# Altium PCB remote control.PcbDoc
Units mil, origin at the board's own origin, x right, y up, seen from the top; angles counter-clockwise.
Board outline 6000 x 4000 mil, 2 copper layers (Top Layer, Bottom Layer); 60 components, 48 nets, 210 pads, 56 vias.
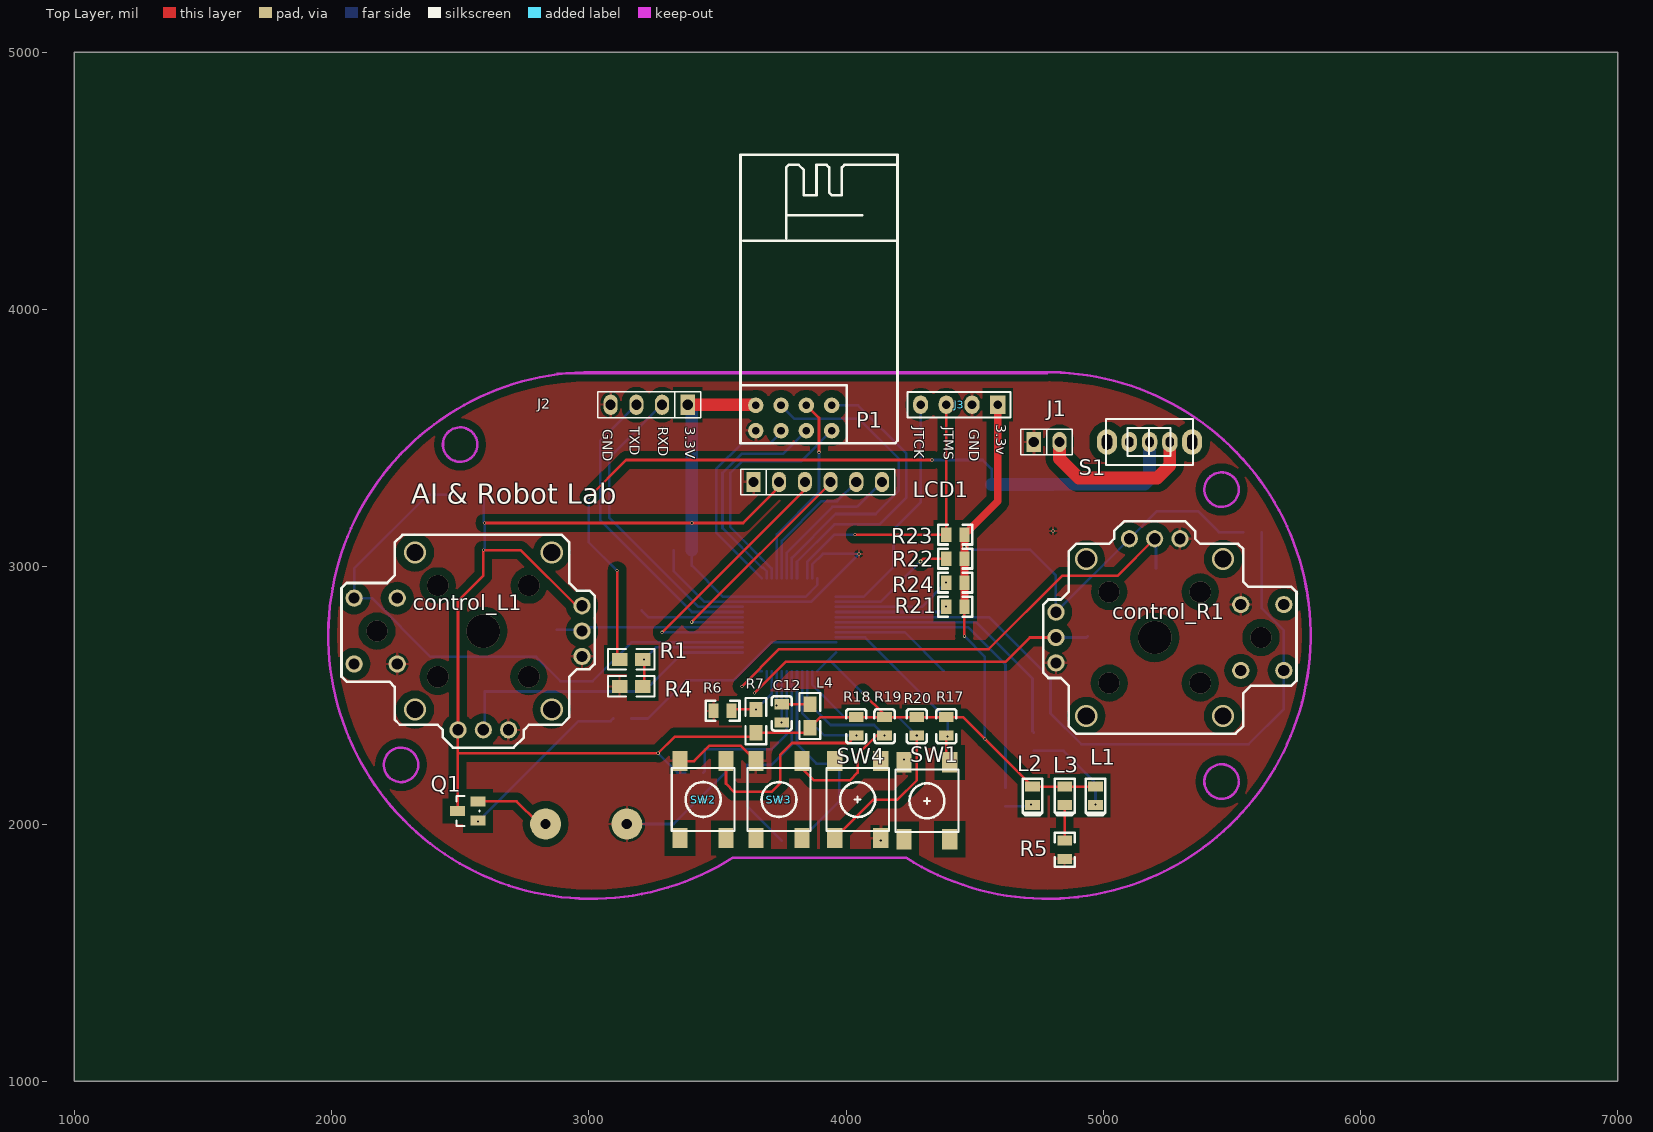
[diagram p0: Top Layer view]
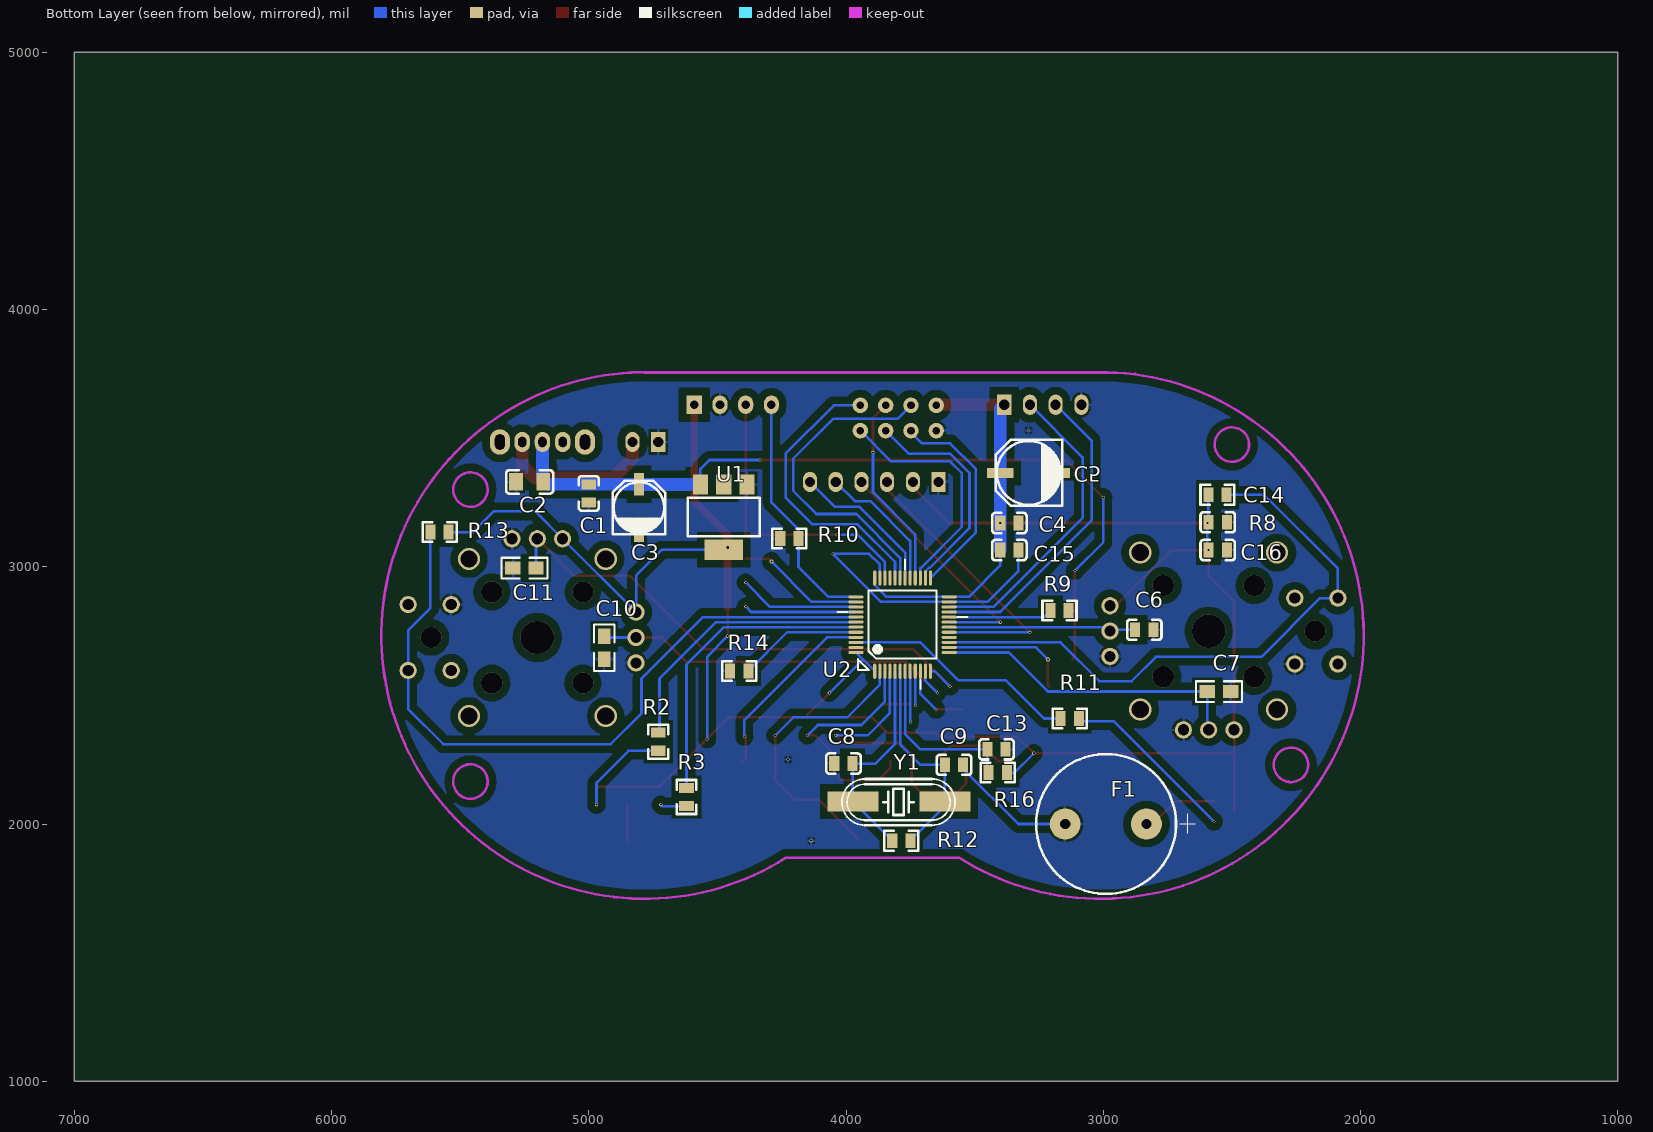
[diagram p1: Bottom Layer view, seen from below]
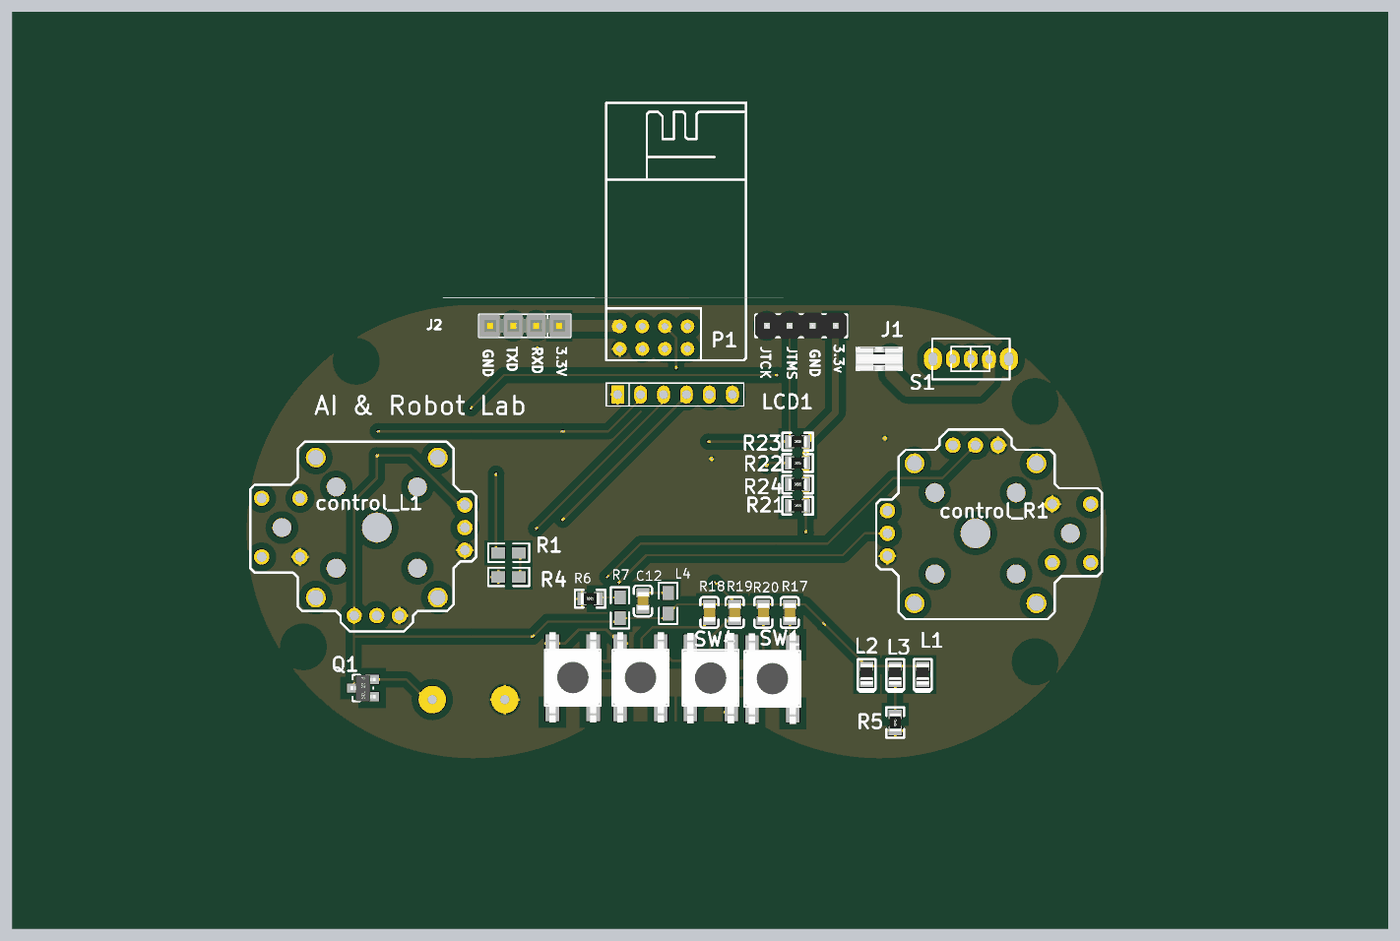
[diagram p2: 3D render of the assembled board from above, using the file's embedded part models]
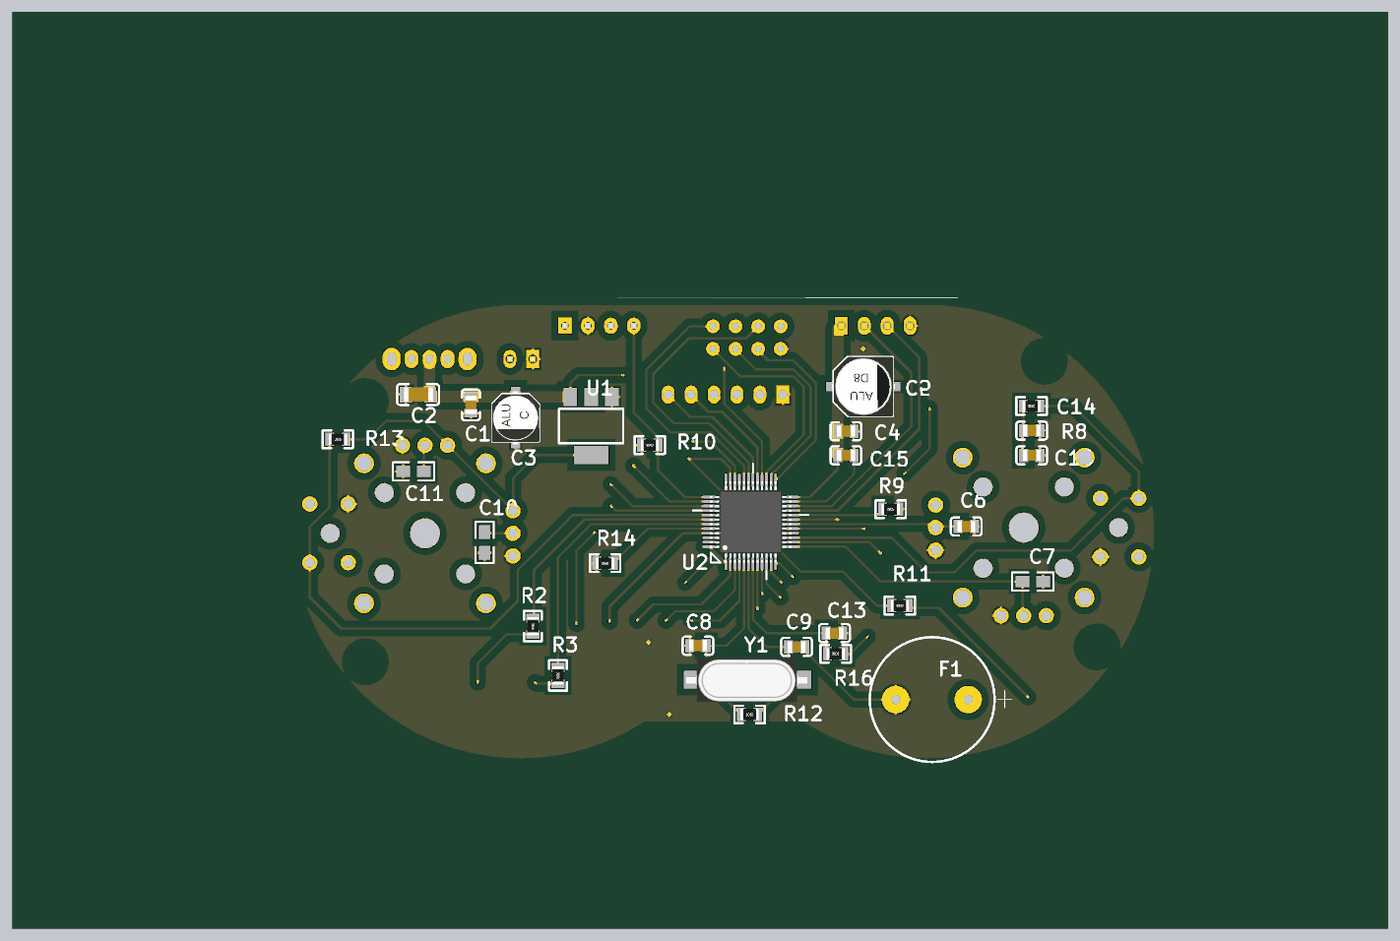
[diagram p3: 3D render of the assembled board from below, using the file's embedded part models]

## Layer stack, top to bottom
Top Solder: solder mask 0.4, Solder Resist, Dk 3.5
Top Layer: signal copper 1.4
Dielectric 1: dielectric 12.6, FR-4, Dk 4.8
Bottom Layer: signal copper 1.4
Bottom Solder: solder mask 0.4, Solder Resist, Dk 3.5

## Board outline
1000,1000 7000,1000 7000,5000 1000,5000
cut-out: 2875,3755 2880,3750 4785,3750

## Design rules (kind name [scope] priority, off if disabled: settings)
Clearance [All] p1: gap=30
PolygonConnect [All] p1: connectstyle=Relief reliefconductorwidth=10 reliefentries=4 polygonreliefangle="90 Angle" airgapwidth=10
RoutingVias [All] p1: holewidth=100 width=200 viastyle="Through Hole" minholewidth=8 minwidth=10 maxholewidth=100 maxwidth=200
SolderMaskExpansion [All] p1: expansion=4
Width [All] p1: maxlimit=50 minlimit=10 preferedwidth=10
29 further rules are at their usual default settings.

## Components (designator, comment, footprint, x,y, rotation, side; value= is the part's Value field where it differs from the comment)
C1 "104" 0805C 5000,3285 r270 bottom
C2 "4.7UF" 1206C 5230,3330 r0 bottom
C3 "CAPE" C_EC 4805,3230 r180 bottom
C4 "0.1UF" 0805C 3365,3170 r180 bottom
C5 "CAPE" C_ED8 3290,3365 r90 bottom
C6 "1uF" 0805C 2840.43,2755 r0 bottom
C7 "1uF" 0805 2505,2515 r0 bottom
C8 "20PF" 0805C 4010,2235 r180 bottom
C9 "20PF" 0805C 3580,2230 r0 bottom
C10 "1uF" 0805 4940,2640 r90 bottom
C11 "1uF" 0805 5295,2995 r180 bottom
C12 "0.1uF" 0805C 3750,2430 r270 top
C13 "104" 0805C 3415,2290 r0 bottom
C14 "100NF" 0805C 2555,3172.92 r180 bottom
C15 "100NF" 0805C 3365,3065 r180 bottom
C16 "100NF" 0805C 2555,3065 r180 bottom
control_L1 "Joy Stick" PS2 2590,2750 r0 top
control_R1 "Joy Stick" PS2 5200,2725 r180 top
F1 "BELL" BELL 2990,2000 r180 bottom
J1 "POWER" SIP2 4730,3485 r0 top
J2 "CON4" SIP4 3385,3630 r180 top
J3 "ST_LINK" P4_2.54-1 4440,3630 r180 top
L1 "LED" 0805D 4970,2110 r270 top
L2 "LED" 0805D 4725,2110 r270 top
L3 "LED" 0805D 4850,2110 r270 top
L4 "INDUCTOR" 0805 3860,2375 r90 top
LCD1 "CON6" SIP6 3640,3330 r0 top
P1 "2.4GHz Module" 2.4Gmedal 3590,3480 r270 top
Q1 "NPN" SOT-23(BEC-123) 2490,2050 r90 top
R1 "RES" 0805 3210,2640 r180 top
R2 "Res1" 0805R 4730,2320 r270 bottom
R3 "Res1" 0805R 4620,2105 r270 bottom
R4 "RES" 0805 3120,2535 r0 top
R5 "Res1" 0805R 4850,1900 r90 top
R6 "RES" 0805 3650,2445 r270 top
R7 "RES" 0805R 3520,2440 r0 top
R8 "10K" 0805R 2555.85,3280 r0 bottom
R9 "RES" 0805R 3170,2830 r180 bottom
R10 "RES" 0805R 4220,3110 r0 bottom
R11 "10K" 0805R 3130,2410 r0 bottom
R12 "RES" 0805R 3785,1935 r0 bottom
R13 "10K" 0805R 5580,3135 r180 bottom
R14 "RES" 0805R 4415,2595 r0 bottom
R16 "10K" 0805R 3410,2200 r180 bottom
R17 "10K" 0805C 4390,2380 r270 top
R18 "10K" 0805C 4040,2380 r270 top
R19 "10K" 0805C 4150,2380 r270 top
R20 "10K" 0805C 4275,2380 r270 top
R21 "RES" 0805R 4425,2845 r0 top
R22 "RES" 0805R 4425,3031.67 r0 top
R23 "RES" 0805R 4425,3125 r0 top
R24 "RES" 0805R 4425,2938.33 r0 top
S1 "SW" KEY_DIP_12D07-4 5180,3485 r180 top
SW1 "FUNC1" KEY_SIM_6X6 4315,2090 r0 top
SW2 "FUNC1" KEY_SIM_6X6 3445,2095 r0 top
SW3 "FUNC1" KEY_SIM_6X6 3740,2095 r0 top
SW4 "FUNC1" KEY_SIM_6X6 4045,2095 r180 top
U1 "AMS1117" SOT223 4385,3320 r0 bottom
U2 "STM32F103C8T6" LQFP48 3780,2775 r90 bottom
Y1 "CRYSTAL1" HC-49T 3795,2085 r0 bottom

## Footprints (in the part's own frame and the unit in brackets; to place one, negate y for a bottom-side part, rotate by r counter-clockwise, add the part's x,y. Pads: shape width x height; smd on the part's side, far side on the other; paste and mask are expansions set on the pad)
2.4Gmedal [mil]
  round 60 hole 30: 1(-49.21,59.06) 2(-147.64,59.06) 3(-49.21,157.48) 4(-147.64,157.48) 5(-49.21,255.91) 6(-147.64,255.91) 7(-49.21,354.33) 8(-147.64,354.33)
  silkscreen extent -1122,0 0,610
0805 [mil]
  rect 60x50 smd: 1(0,0) 2(90,0)
  silkscreen extent -45,-40 135,40
0805C [mm]
  rect 1x1.45 smd: 1(-0.9,0) 2(0.9,0)
  Top Layer pour cut-out: -0.432,0.749 -0.432,-0.737 0.406,-0.737 0.406,0.749
  silkscreen extent -1.7,-1 1.7,1, body extent -1,-0.61 1,0.64, height 1
0805D [mm]
  rect 1x1.45 smd: 1(-0.9,0) 2(0.9,0)
  Top Layer pour cut-out: -0.432,0.749 -0.432,-0.737 0.406,-0.737 0.406,0.749
  silkscreen extent -1.66,-0.98 1.94,0.98, body extent -1.16,-0.68 1.14,0.67, height 0.76
0805R [mm]
  rect 1x1.45 smd: 1(-0.9,0) 2(0.9,0)
  Top Layer pour cut-out: -0.432,0.749 -0.432,-0.737 0.406,-0.737 0.406,0.749
  silkscreen extent -1.68,-0.98 1.68,0.98, body extent -1,-0.62 1,0.63, height 0.5
1206C [mm]
  rect 1.35x1.75 smd: 1(-1.35,0) 2(1.35,0)
  Top Layer pour cut-out: -0.686,0.876 0.673,0.876 0.673,-0.864 -0.686,-0.864
  silkscreen extent -2.32,-1.16 2.32,1.16, body extent -1.65,-0.81 1.55,0.79, height 1
BELL [mil]
  round 120 hole 40: 1(158,0) 2(-158,0)
  silkscreen extent -271,-272 348,272
C_EC [mm] "5.0X5.4"
  rect 1x2.2 smd: 1(0,2.3) 2(0,-2.3)
  silkscreen extent -2.59,-2.64 2.59,2.64, body extent -2.66,-3 2.64,2.9, height 5.41
C_ED8 [mm] "6.3X7.7"
  rect 1x2.6 smd: 1(0,2.8) 2(0,-2.8)
  silkscreen extent -3.25,-3.3 3.25,3.25, body extent -3.3,-3.55 3.3,3.45, height 7.7
HC-49T [mil]
  rect 196.85x78.74 smd: 1(-180,-2) 2(178,-2)
  silkscreen extent -219,-90 221,90, body extent -262,-96 266,97, height 157
KEY_DIP_12D07-4 [mm]
  oval 1.524x2 hole 0.8 slot 1 at 90 deg: 1(-2,0) 2(0,0) 3(2,0)
  oval 2x2.5 hole 1 slot 1.5 at 90 deg: 4(-4.2,0) 5(4.2,0)
  silkscreen extent -4.3,-2.25 4.3,2.25
KEY_SIM_6X6 [mm]
  rect 1.5x2 smd: 1(-2.286,3.8) 2(2.245,3.8) 3(-2.286,-3.8) 4(2.245,-3.8)
  silkscreen extent -3.11,-3.1 3.09,3.1, body extent -3.01,-4.97 2.99,5.03, height 4.99
LQFP48 [mm]
  oval 1.5x0.3 smd: 1(-4.6,2.75) 2(-4.6,2.25) 3(-4.6,1.75) 4(-4.6,1.25) 5(-4.6,0.75) 6(-4.6,0.25) 7(-4.6,-0.25) 8(-4.6,-0.75) 9(-4.6,-1.25) 10(-4.6,-1.75) 11(-4.6,-2.25) 12(-4.6,-2.75) 25(4.6,-2.75) 26(4.6,-2.25) 27(4.6,-1.75) 28(4.6,-1.25) 29(4.6,-0.75) 30(4.6,-0.25) 31(4.6,0.25) 32(4.6,0.75) 33(4.6,1.25) 34(4.6,1.75) 35(4.6,2.25) 36(4.6,2.75)
  oval 0.3x1.5 smd: 13(-2.75,-4.6) 14(-2.25,-4.6) 15(-1.75,-4.6) 16(-1.25,-4.6) 17(-0.75,-4.6) 18(-0.25,-4.6) 19(0.25,-4.6) 20(0.75,-4.6) 21(1.25,-4.6) 22(1.75,-4.6) 23(2.25,-4.6) 24(2.75,-4.6) 37(2.75,4.6) 38(2.25,4.6) 39(1.75,4.6) 40(1.25,4.6) 41(0.75,4.6) 42(0.25,4.6) 43(-0.25,4.6) 44(-0.75,4.6) 45(-1.25,4.6) 46(-1.75,4.6) 47(-2.25,4.6) 48(-2.75,4.6)
  silkscreen extent -6.35,-6.42 6.44,6.42, body extent -4.53,-4.51 4.5,4.51, height 1.75
P4_2.54-1 [mm]
  rect 1.5x1.8 hole 0.85: 1(-3.81,0)
  oval 1.5x1.8 hole 0.85: 2(-1.27,0) 3(1.27,0) 4(3.81,0)
  silkscreen extent -5.08,-1.27 5.08,1.27, body extent -5.08,-1.47 5.08,1.45, height 8.56
PS2 [mm]
  round 1.7 hole 1.1: 1(9.75,2.5) 2(9.75,0) 3(9.75,-2.5) 4(2.5,-9.75) 5(0,-9.75) 6(-2.5,-9.75) 7(-8.5,-3.25) 8(-12.75,-3.25) 9(-8.5,3.25) 10(-12.75,3.25)
  silkscreen extent -14,-11.5 11,9.5
SIP2 [mm]
  rect 1.4x2 hole 1: 1(0,0)
  oval 1.4x2 hole 1: 2(2.54,0)
  silkscreen extent -1.27,-1.27 3.81,1.27, body extent -1.27,-1.27 3.81,1.27, height 16.41
SIP4 [mm]
  rect 1.4x2 hole 1: 1(0,0)
  oval 1.4x2 hole 1: 2(2.54,0) 3(5.08,0) 4(7.62,0)
  silkscreen extent -1.27,-1.27 8.89,1.27, body extent -1.27,-1.27 8.89,1.27, height 8.89
SIP6 [mm]
  rect 1.4x2 hole 1: 1(0,0)
  oval 1.4x2 hole 1: 2(2.54,0) 3(5.08,0) 4(7.62,0) 5(10.16,0) 6(12.7,0)
  silkscreen extent -1.27,-1.27 13.97,1.27, body extent -1.27,-1.27 13.97,1.27, height 8.89
SOT223 [mil]
  rect 59x79 smd: 1(0,0) 2(90.55,0) 3(181.1,0)
  rect 150x79 smd: 4(89.88,253.54)
  silkscreen extent -49,52 231,202
SOT-23(BEC-123) [mm]
  rect 1x1.5 smd: B(-0.941,-2.032) C(0,0) E(0.964,-2.032)
  Top Layer pour cut-out: 1.25,0.4 1.25,-2.65 -1.3,-2.65 -1.3,0.4
  silkscreen extent -1.45,-2.16 1.47,0.13, body extent -1.45,-2.42 1.45,0.38, height 1.2

## Part data
C1: library part Cap, "Capacitor"
C2 C4 C8 C9 C12 C14 C15 C16: library part CAP, "Capacitor/小容量电容"
C6 C7 C10 C11: library part CAP
C13: library part CAP, "GRM39 X7R102K50PT"
control_L1 control_R1: "Header, 10-Pin, Dual row"
J1: library part SIP2
J3: library part SIP4
P1: library part "Header 4X2", "Header, 10-Pin, Dual row"
R1 R4 R6 R7 R9 R10 R12 R14 R21 R22 R23 R24: "Semiconductor Resistor"
R2 R3 R5: "Resistor"
R8 R11 R13 R16 R17 R18 R19 R20: library part RES
S1: library part SW_拨动_小型
SW1 SW2 SW3 SW4: library part SW-PB, "Switch"
U1: "Header, 2-Pin"
U2: "STM32 ARM-based 32-bit MCU with 64 Kbytes Flash, 48-pin LQFP, Industrial Temperature"

## Via types
v1: diameter 12, hole 8, Top Layer to Bottom Layer, 30 vias
v2: diameter 82.68, hole 82.68, Top Layer to Bottom Layer, 10 vias
v3: diameter 86.61, hole 66.93, Top Layer to Bottom Layer, 8 vias
v4: diameter 13, hole 8, Top Layer to Bottom Layer, 3 vias
v5: diameter 15, hole 8, Top Layer to Bottom Layer, 2 vias
v6: diameter 129.92, hole 129.92, Top Layer to Bottom Layer, 2 vias
v7: diameter 20, hole 10, Top Layer to Bottom Layer, 1 vias

## Nets (pads, with @x,y where several pads share a name; then routed paths per layer and width w, separated by ;. In a path a pad name is that pad's centre, name@x,y a point inside that pad or via, vN(x,y) a via of type N, cw(c..) or ccw(c..) an arc to the next point about the centre after c; other vN are vias at no path point)
2.4_CE: P1.3 U2.25 | length 815.3
  Bottom Layer w10: U2.25 3495,3132.83 3495,3380 3595,3480 3705,3480 3747.48,3522.48 P1.3
2.4_CSN: P1.4 U2.31 | length 1270.2
  Bottom Layer w10: P1.4 3800.12,3575 4050,3575 4205,3420 4205,3295 4115,3205 3960,3205 3789.84,3034.84 U2.31
2.4_IRQ: P1.8 U2.32 | length 1131
  Bottom Layer w10: U2.32 3809.53,3019.53 3955,3165 4130,3165 4235,3270 4235,3440 4047.36,3627.64 P1.8
2.4_MISO: P1.7 U2.27 | length 938
  Bottom Layer w10: U2.27 3711.1,2993.9 3550,3155 3550,3365 3595,3410 3825.12,3410 P1.7
2.4_MOSI: P1.6 U2.28 | length 759.9
  Top Layer w10: P1.6 3895,3578.54 v4(3895,3445)
  Bottom Layer w10: U2.28 3730.79,3125.79 3895,3290 v4(3895,3445)
2.4_SCK: P1.5 U2.26 | length 876.1
  Bottom Layer w10: U2.26 3691.42,2982.53 3678.32,2995.63 3674.37,2995.63 3520,3150 3520,3365 3595,3440 3756.69,3440 P1.5
+3.3V: C4.1 C5.1 C14.1 C15.1 C16.1 control_L1.1 control_L1.6 control_R1.3 control_R1.4 J2.1 J3.1 L1.1 L2.1 L3.1 L4.1 LCD1.2 P1.2 Q1.C R6.2 R8.2 R13.2 R16.2 R17.1 R18.1 R19.1 R20.1 R21.2 R22.2 R23.2 R24.2 U1.4 U2.1 U2.24 U2.36 U2.48 | length 10497.6
  Top Layer w10: Q1.C 2490,2275 ; v1(2595,3170) v1(3400.43,3170) 3600,3170 3740,3310 LCD1.2 ; control_L1.1 2951.57,2848.43 2735,3065 v1(2590.43,3065) 2590.43,2965.43 2491.57,2866.57 control_L1.6 2490,2364.57 2490,2275 ; v1(4065,2510) 4150,2425 R19.1 ; v1(4460,2730) 4460,2844.57 R21.2 ; L1.1 L3.1 L2.1 4455,2415.43 R17.1 R20.1 R19.1 ; 2490,2275 v1(3270,2275) 3335,2340 3635,2340 R6.2 3840,2355 L4.1 3900.43,2415.43 R18.1 R19.1
  Top Layer w30: R21.2 R24.2 R22.2 R23.2 4590,3254.57 J3.1
  Top Layer w50: J2.1 3646.69,3630 P1.2
  Bottom Layer w10: C14.1@2591.28,3173.72 R8.2 ; C16.1@2595,3069.57 v1(2595,3170) ; v1@3270,2274.57 v1(3270,2275) 3345,2200 R16.2 ; C15.1 3400.43,3004.57 3521.73,2883.27 U2.24 3841.86,2883.27 3888.27,2929.67 U2.36 ; U2.1 U2.48 ; 3934.68,2640.32 v1(4065,2510) ; v1(4460,2730) 4540,2650 v1(4540,2330) ; v7(4460,3075) 4466.34,3075 U1.4 4715.83,3066.46 4816.14,2966.14 control_R1.3 control_R1.4 5207.72,3215 5370,3215 5450,3135 R13.2
  Bottom Layer w50: J2.1 3400.24,3614.76 C5.1 C15.1@3400.24,3065.2
"ADC PITCH": C11.2 control_R1.5 U2.12 | length 2059.8
  Top Layer w10: v1(3595,2535) 3740,2680 4555,2680 4840,2965 5056.14,2965 control_R1.5
  Bottom Layer w10: v1(3595,2535) 3596.1,2535 3655,2593.9 U2.12 ; control_R1.5 5205,3103.86 C11.2
"ADC ROLL": C10.2 control_R1.2 U2.11 | length 1489.3
  Top Layer w10: v1(3645,2510) 3765,2630 4620,2630 4715,2725 control_R1.2
  Bottom Layer w10: v1(3645,2510) 3691.42,2556.42 U2.11 ; control_R1.2 4935,2725 C10.2
"ADC THR": C6.2 control_L1.2 U2.18 | length 731.4
  Bottom Layer w10: C6.2 2968.86,2755 control_L1.2 2989.02,2765.16 U2.18
"ADC YAW": C7.2 control_L1.5 U2.13 | length 1217.7
  Bottom Layer w10: control_L1.5 2595,2371.14 C7.2 3215,2515 3366.73,2666.73 U2.13
BAT+: C1.1 C2.1 C3.1 R1.2 S1.2 U1.3 | length 3147.5
  Top Layer w10: v1(3000,3270) 3145,3415 v1(4335,3415) ; v1(3110,2985) 3110,2650 R1.2
  Bottom Layer w10: v1(3000,3270) 3000,3095 v1(3110,2985) ; v1(4335,3415) 4531.1,3415 4566.1,3380 U1.3
  Bottom Layer w50: U1.3 4804.45,3320 C3.1 5160.55,3320.55 5180,3340 S1.2
BELL: R11.2 U2.46 | length 918.3
  Bottom Layer w10: R11.2 3230,2410 3378.36,2558.36 3563.36,2558.36 3711.1,2706.1 U2.46
D/C: LCD1.6 U2.30 | length 579.2
  Bottom Layer w10: U2.30 3770.16,3055.16 3947.5,3232.5 4042.5,3232.5 ; 4045,3235 LCD1.6
GND: C1.2 C2.2 C3.2 C4.2 C5.2 C6.1 C7.1 C8.1 C9.1 C10.1 C11.1 C12.2 C13.1 C14.2 C15.2 C16.2 control_L1.3 control_L1.4 control_L1.7 control_R1.1 control_R1.6 control_R1.7 F1.2 J1.1 J2.4 J3.2 LCD1.1 P1.1 R4.1 R5.1 R7.1 R9.2 R10.2 R14.2 SW1.1 SW2.1 SW3.1 SW4.1 U1.1 U2.8 U2.23 U2.35 U2.47 | length 2223.8
  Top Layer w10: SW2.1 3409.61,2244.61 3470,2305 3589.61,2305 SW3.1
  Bottom Layer w10: F1.2 3330,2000 3544.57,2214.57 C9.1 ; C15.2 3329.57,2984.22 3450.2,2863.58 U2.23 3863.58,2863.58 v1(4050,3050) 3910,3050 3868.58,3008.58 U2.35 ; v1@3750.47,2395.47 U2.8
  other v1: 4135,1935 4225,2250 3750,2395 4805,3139.45 3290,3530
JTCK: J3.4 R10.1 U2.37 | length 945.7
  Bottom Layer w10: U2.37 4068.27,2883.27 4184.57,2999.57 R10.1 4184.57,3144.57 4290,3250 J3.4
JTDI: R22.1 U2.38 | length 498.1
  Top Layer w10: v5(4290,3020) 4301.67,3031.67 R22.1
  Bottom Layer w10: U2.38 4133.58,2863.58 v5(4290,3020)
JTDO: R24.1 U2.39 | length 467.6
  Bottom Layer w10: U2.39 4295.13,2843.9 v1(4389.57,2938.33)
JTMS: J3.3 R23.1 U2.34 | length 1152.6
  Top Layer w10: v1(4035,3125) R23.1 4389.57,3629.57 J3.3
  Bottom Layer w10: U2.34 3848.9,3018.9 3955,3125 v1(4035,3125)
JTRST: R21.1 U2.40 | length 437.1
  Bottom Layer w10: U2.40 4368.78,2824.21 v1(4389.57,2845)
KEY1: R17.2 SW1.2 U2.45 | length 742.3
  Top Layer w10: R17.2 4390,2252.99 SW1.2
  Bottom Layer w10: U2.45 4074.21,2725.79 4395,2405 v1(4395,2340)
KEY2: R18.2 SW2.2 U2.4 | length 1172.7
  Top Layer w10: SW2.2 3533.39,2156.61 3565,2125 3710,2125 3745,2160 3745,2270 3790,2315 4010.43,2315 v1(4040,2344.57)
  Bottom Layer w10: U2.4 3829.21,2430.79 3915.43,2344.57 v1(4040,2344.57)
KEY3: R19.2 SW3.2 U2.3 | length 955.6
  Top Layer w10: SW3.2 3828.39,2216.61 3875,2170 4015,2170 4045,2200 4045,2270 4119.57,2344.57 v1(4150,2344.57)
  Bottom Layer w10: U2.3 3848.9,2476.1 3940,2385 4109.57,2385 v1(4150,2344.57)
KEY4: R20.2 SW4.2 U2.2 | length 1126.4
  Top Layer w10: SW4.2 4106.22,2095 4200,2095 4275,2170 v1(4275,2344.57)
  Bottom Layer w10: U2.2 3868.58,2541.42 3995,2415 4204.57,2415 v1(4275,2344.57)
KEY_LEFT: control_L1.10 R8.1 U2.15 | length 2373.6
  Bottom Layer w10: R8.1 2375,3280 2088.03,2993.03 control_L1.10 2157.05,2877.95 2385,2650 2795,2650 2890,2555 3015,2555 3166.1,2706.1 U2.15
KEY_RIGHT: control_R1.10 R13.1 U2.41 | length 2805.4
  Bottom Layer w10: U2.41 4555.47,2804.53 4795,2565 4795,2430 4915,2310 5565,2310 5701.97,2446.97 control_R1.10 5701.97,2753.03 5615.43,2839.57 R13.1
LED_1: R2.1 U2.42 | length 1066.6
  Bottom Layer w10: U2.42 4505.16,2784.84 4725,2565 4725,2360.43 R2.1
LED_2: R3.1 U2.43 | length 1198.6
  Bottom Layer w10: U2.43 4474.84,2765.16 4620,2620 R3.1
NetC8_2: C8.2 R12.2 U2.5 Y1.2 | length 843.3
  Bottom Layer w10: U2.5 3809.53,2310.47 3885,2235 C8.2 3974.57,2088.57 Y1.2 R12.2@3821,1935
NetC9_2: C9.2 R12.1 U2.6 Y1.1 | length 842.1
  Bottom Layer w10: R12.1 3615.43,2069.13 C9.2 3710,2230 3789.84,2309.84 U2.6
NetC12_1: C12.1 L4.2 U2.9 | length 244.4
  Top Layer w10: C12.1 3859.57,2465.43 L4.2
  Bottom Layer w10: v1(3730,2460) 3730.79,2460.79 U2.9
NetF1_1: F1.1 Q1.E | length 266.4
  Top Layer w10: Q1.E 2719.04,2087.96 F1.1@2802,2005
NetJ1_2: J1.2 S1.1 | length 636.3
  Top Layer w50: J1.2 4830,3420 4905,3345 5210,3345 5258.74,3393.74 S1.1
NetL1_2: L1.2 R2.2 | length 376.6
  Bottom Layer w10: R2.2 4845.43,2284.57 4970,2160 v1(4970,2075)
NetL2_2: L2.2 R3.2 | length 102.3
  Bottom Layer w10: R3.2 4714.57,2069.57 v1(4720,2075)
NetL3_2: L3.2 R5.2 | length 139.1
  Top Layer w10: R5.2 L3.2
NetQ1_B: Q1.B R11.1 | length 690.3
  Bottom Layer w10: v1(2570,2010) 2960,2400 3084.57,2400 R11.1
NetR6_1: R6.1 R7.2 U2.10 | length 274.4
  Top Layer w10: R7.2@3550,2445.43 3649.57,2445.43 v1(3650,2445)
  Bottom Layer w10: v1(3650,2445) 3711.1,2506.1 U2.10
NetR9_1: R9.1 U2.20 | length 404
  Bottom Layer w10: R9.1 3230.91,2804.53 U2.20
NetR14_1: R14.1 U2.44 | length 480.8
  Bottom Layer w10: U2.44 4229.09,2745.47 R14.1
OUT_1: U2.16
PADC: R1.1 R4.2 U2.14 | length 510.2
  Top Layer w10: R4.2 3215,2540 v5(3215,2640)
  Bottom Layer w10: v5(3215,2640) 3261.42,2686.42 U2.14
RESET: C13.2 R16.1 U2.7 | length 680.5
  Bottom Layer w10: R16.1 3450.43,2205 C13.2 3710,2290 3770.16,2350.16 U2.7
RET: LCD1.5 U2.29 | length 529
  Bottom Layer w10: U2.29 3750.47,3100.47 3905,3255 3965,3255 LCD1.5
RXD: J2.2 U2.22 | length 1187.2
  Bottom Layer w10: J2.2 3080,3425 3080,3190 3426.1,2843.9 U2.22
SCL: LCD1.3 U2.17 | length 1098.3
  Top Layer w10: v4(3285,2745) LCD1.3@3840,3300
  Bottom Layer w10: v4@3285.47,2745.47 U2.17
SDA: LCD1.4 U2.19 | length 967.5
  Top Layer w10: v4(3400.16,2784.84) 3940,3324.69 LCD1.4
  Bottom Layer w10: v4(3400.16,2784.84) U2.19
TXD: J2.3 U2.21 | length 1209.3
  Bottom Layer w10: J2.3 3045,3490 3045,3180 3400.79,2824.21 U2.21
pads on no net: control_L1.8 control_L1.9 control_R1.8 control_R1.9 S1.3 S1.4 S1.5 SW1.3 SW1.4 SW2.3 SW2.4 SW3.3 SW3.4 SW4.3 SW4.4 U1.2 U2.33
copper on no net:
  other v2: 5022.83,2547.83 5377.17,2547.83 2412.83,2572.83 2767.17,2572.83 5613.39,2725 2176.61,2750 5022.83,2902.17 5377.17,2902.17 2412.83,2927.17 2767.17,2927.17
  other v3: 4934.25,2419.88 5465.75,2419.88 2324.25,2444.88 2855.75,2444.88 4934.25,3030.12 5465.75,3030.12 2324.25,3055.12 2855.75,3055.12
  other v6: 5200,2725 2590,2750

## Polygon pours and split planes (outlines as drawn)
GND on Bottom Layer "Bottom Layer-No Net" (solid, remove dead copper, pour order 4): 1475,4265 1585,4155 6105,4155 6105,1470 6135,1440 5935,1240 1475,1240
GND on Top Layer "Bottom Layer-No Net" (solid, remove dead copper, pour order 4): 1910,4280 5675,4280 5885,4070 6210,3745 6210,1605 1520,1605 1455,1540

## Keep-outs
Keep-Out Layer:
  circle w10: c2270,2230 r66.93
  circle w10: c2500,3475 r66.93
  circle w10: c5460,3300 r66.93
  lines w10: 2983.02,3756.04 ccw(c3010.94,2732.8) 3560.82,1869.41 4234.35,1869.41 ; 2983.6,3756.25 4764.14,3756.25 cw(c4782.6,2732.8) 4234.35,1868.38 ; 5526.5,2172.56 ccw(c5460,2165) 5526.93,2165

## Silkscreen, mask and mechanical layers (free items; w line width, h text height)
Top Overlay:
  text "3.3v" at 4585,3555 h40 r270
  text "TXD" at 3160,3545 h40 r270
  text "RXD" at 3270,3545 h40 r270
  text "3.3V" at 3375,3545 h40 r270
  text "JTCK" at 4265,3545 h40 r270
  text "JTMS" at 4380,3545 h40 r270
  text "GND" at 3055,3535 h40 r270
  text "GND" at 4480,3535 h40 r270
  text "AI & Robot Lab" at 2310,3245 h78.74